# EAGLE board car_key (EAGLE 9.5.1)
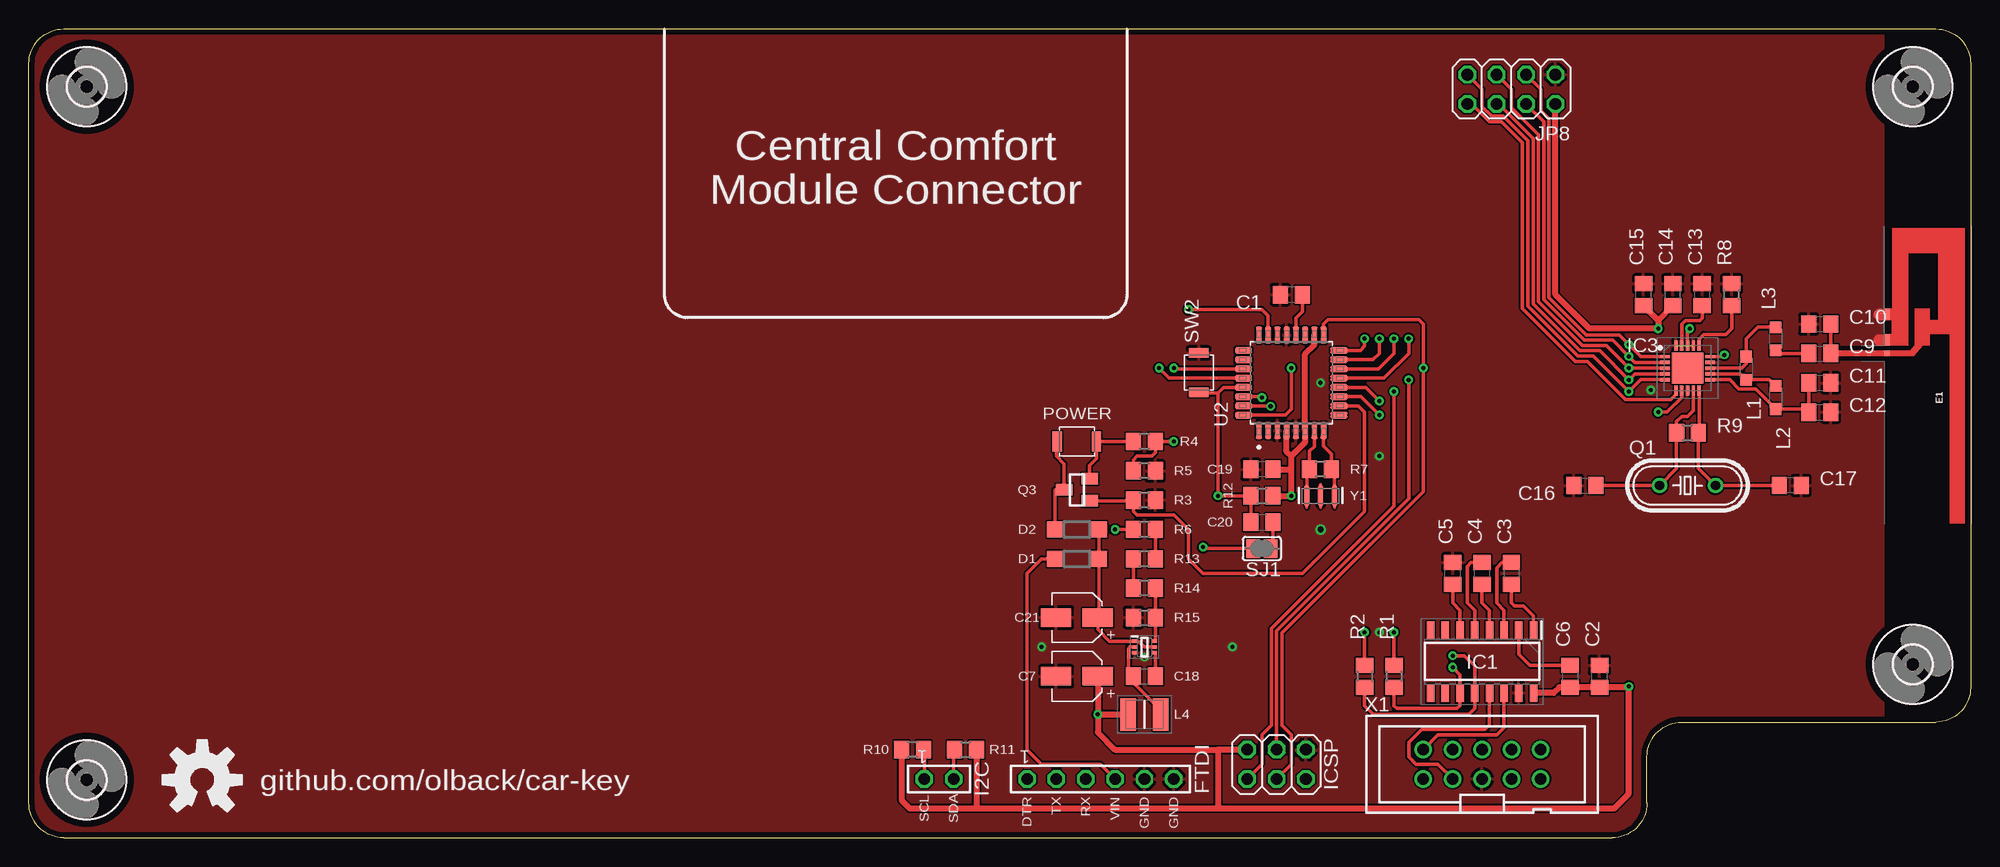
[diagram p0: board, top side]
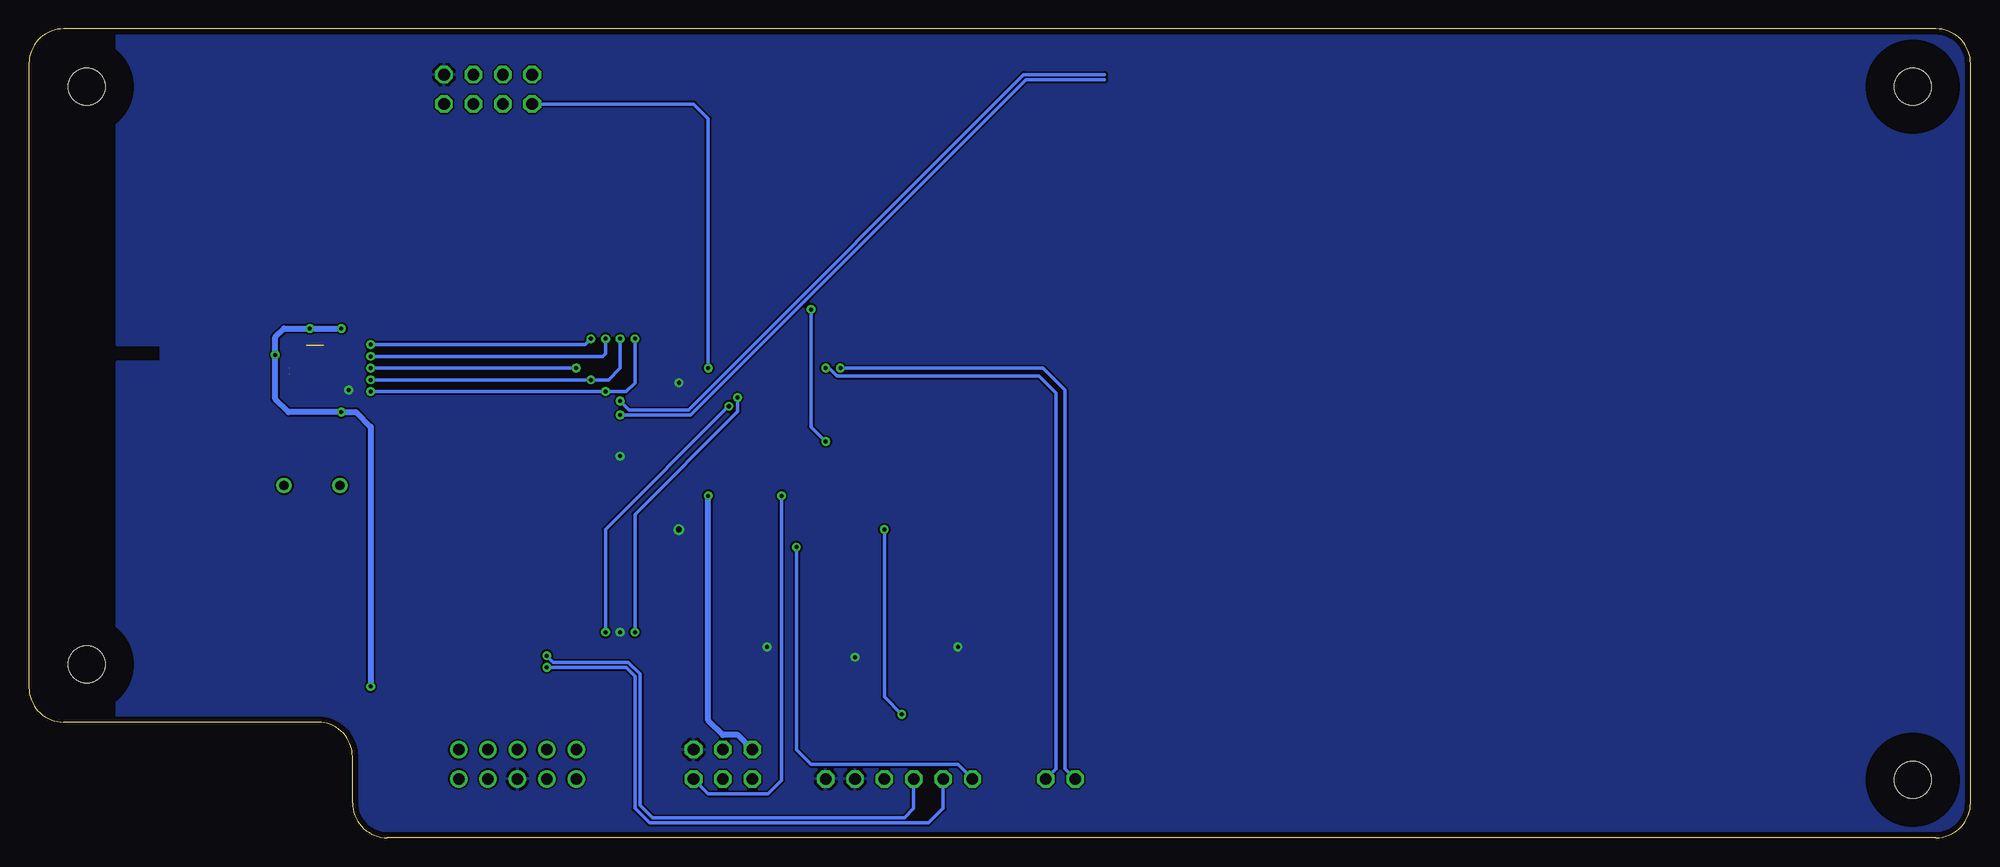
[diagram p1: board, bottom side, seen from below]

Size 168 x 70 mm. Coordinates in mm from the lower left corner, seen from the top.
Outline: 165,70 arc-90 168,67 168,13 arc-90 165,10 143,10 arc90 140,7 140,3 arc-90 137,0 3,0 arc-90 0,3 0,67 arc-90 3,70 165,70
Copper layers (1*16): Top 0.035mm / dielectric 1.5mm / Bottom 0.035mm
Design rules "default *": minimum track width 10mil, minimum drill 0.35mm, track to track 6mil, track to pad 6mil, pad to pad 6mil, via to via 6mil, smd to smd 6mil, copper to edge 20mil, drill to drill 8mil, minimum pad ring 10mil, minimum via ring 8mil, stop-mask expansion 4mil, vias tented up to drill 0mil, thermal gap 10mil

## Footprints (pad centres in the part's own frame; a part is rotated, then mirrored left to right if it is on the bottom)
C0805 = smd 1.3 x 1.5: 1 -0.95,0; 2 0.95,0
2.6X1.6X1(BXCXA) = smd 2.6 x 1.6: 1 1.8,0; 2 -1.8,0
SOD123 = smd 1.4 x 1.4: A 1.9,0; C -1.9,0
TRACE_ANTENNA_2.4GHZ_25.7MM = smd 0.46 x 0.46: ANT 0,0.23 | smd 1 x 0.46: GND -1.18,0.23; GND2 -3.38,0.23
TSW-106-XX-G-S = drill 1 pad 1.5 octagon: 1 6.35,0; 2 3.81,0; 3 1.27,0; 4 -1.27,0; 5 -3.81,0; 6 -6.35,0
TSW-102-XX-G-S = drill 1 pad 1.5 octagon: 1 1.27,0; 2 -1.27,0
SOIC127P600X175-16N = smd 1.525 x 0.65: 1 -2.712,4.445; 2 -2.712,3.175; 3 -2.712,1.905; 4 -2.712,0.635; 5 -2.712,-0.635; 6 -2.712,-1.905; 7 -2.712,-3.175; 8 -2.712,-4.445; 9 2.712,-4.445; 10 2.712,-3.175; 11 2.712,-1.905; 12 2.712,-0.635; 13 2.712,0.635; 14 2.712,1.905; 15 2.712,3.175; 16 2.712,4.445
QFN50P400X400X95-21N = smd 0.85 x 0.3: 1 -1.95,1; 2 -1.95,0.5; 3 -1.95,0; 4 -1.95,-0.5; 5 -1.95,-1; 11 1.95,-1; 12 1.95,-0.5; 13 1.95,0; 14 1.95,0.5; 15 1.95,1 | smd 0.3 x 0.85: 6 -1,-1.95; 7 -0.5,-1.95; 8 0,-1.95; 9 0.5,-1.95; 10 1,-1.95; 16 1,1.95; 17 0.5,1.95; 18 0,1.95; 19 -0.5,1.95; 20 -1,1.95 | smd 2.7 x 2.7: 21 0,0
SOTFL50P160X60-6N = smd 0.475 x 0.3: 1 -0.838,0.5; 2 -0.838,0; 3 -0.838,-0.5; 4 0.838,-0.5; 5 0.838,0; 6 0.838,0.5
2X03 = drill 1.016 octagon: 1 -2.54,-1.27; 2 -2.54,1.27; 3 0,-1.27; 4 0,1.27; 5 2.54,-1.27; 6 2.54,1.27
2X04 = drill 1.016 octagon: 1 -3.81,-1.27; 2 -3.81,1.27; 3 -1.27,-1.27; 4 -1.27,1.27; 5 1.27,-1.27; 6 1.27,1.27; 7 3.81,-1.27; 8 3.81,1.27
L2012C = smd 1 x 1: 1 -1,0; 2 1,0
INDC3225X200N = smd 1.35 x 2.8: 1 -1.4,0; 2 1.4,0
B3U-1000P = smd 0.8 x 1.7: 1 -1.7,0; 2 1.7,0
HC49/S = drill 0.813: 1 -2.413,0; 2 2.413,0
SUPER-SOT3 = smd 1 x 1.4: 1 -0.95,-1.1; 2 0.95,-1.1; 3 0,1.1
R0805 = smd 1.3 x 1.5: 1 -0.95,0; 2 0.95,0
SJ = smd 1.168 x 1.6: 1 -0.762,0; 2 0.762,0
TQFP-32 = smd 1.5 x 0.57: 1 -4.13,2.8; 2 -4.13,2; 3 -4.13,1.2; 4 -4.13,0.4; 5 -4.13,-0.4; 6 -4.13,-1.2; 7 -4.13,-2; 8 -4.13,-2.8; 17 4.13,-2.8; 18 4.13,-2; 19 4.13,-1.2; 20 4.13,-0.4; 21 4.13,0.4; 22 4.13,1.2; 23 4.13,2; 24 4.13,2.8 | smd 0.57 x 1.5: 9 -2.8,-4.13; 10 -2,-4.13; 11 -1.2,-4.13; 12 -0.4,-4.13; 13 0.4,-4.13; 14 1.2,-4.13; 15 2,-4.13; 16 2.8,-4.13; 25 2.8,4.13; 26 2,4.13; 27 1.2,4.13; 28 0.4,4.13; 29 -0.4,4.13; 30 -1.2,4.13; 31 -2,4.13; 32 -2.8,4.13
3,2 = hole 3.2: 0,0
PAK100/2500-10 = drill 1 pad 1.422: 1 -5.08,-1.27; 2 -5.08,1.27; 3 -2.54,-1.27; 4 -2.54,1.27; 5 0,-1.27; 6 0,1.27; 7 2.54,-1.27; 8 2.54,1.27; 9 5.08,-1.27; 10 5.08,1.27
RESONATOR-SMD-3.2X1.3 = smd 0.45 x 1.905: 1 -1.2,0; 2 0,0; 3 1.2,0

## Placement (x,y rotation side)
C1  0.1uF  [C0805]  109.22,46.99 180 top
C2  0.1uF  [C0805]  135.89,13.97 90 top
C3  0.1uF  [C0805]  128.27,22.86 270 top
C4  0.1uF  [C0805]  125.73,22.86 90 top
C5  0.1uF  [C0805]  123.19,22.86 90 top
C6  0.1uF  [C0805]  133.35,13.97 270 top
C7  47u  [2.6X1.6X1(BXCXA)]  90.68,13.97 0 top
C9  1.5pF  [C0805]  154.94,41.91 0 top
C10  1pF  [C0805]  154.94,44.45 0 top
C11  2.2nF  [C0805]  154.94,39.37 0 top
C12  4.7pF  [C0805]  154.94,36.83 0 top
C13  33nF  [C0805]  144.78,46.99 90 top
C14  10nF  [C0805]  142.24,46.99 90 top
C15  1nF  [C0805]  139.7,46.99 90 top
C16  22pF  [C0805]  134.62,30.48 0 top
C17  22pF  [C0805]  152.4,30.48 180 top
C18  0.1u  [C0805]  96.52,13.97 0 top
C19  0.1uF  [C0805]  106.68,31.88 180 top
C20  0.1uF  [C0805]  106.68,27.3 0 top
C21  10u  [2.6X1.6X1(BXCXA)]  90.68,19.05 0 top
D1  [SOD123]  90.68,24.13 180 top
D2  [SOD123]  90.68,26.67 180 top
E1  ANTENNA-GROUNDEDTRACE-25.7MM  [TRACE_ANTENNA_2.4GHZ_25.7MM]  160.53,41.91 270 top
FTDI  TSW-106-08-G-S  [TSW-106-XX-G-S]  92.71,5.08 180 top
I2C  TSW-102-08-G-S  [TSW-102-XX-G-S]  78.74,5.08 180 top
IC1  MAX3232ECD  [SOIC127P600X175-16N]  125.73,15.24 270 top
IC3  NRF24L01P-R7  [QFN50P400X400X95-21N]  143.51,40.64 0 top
IC4  TPS562231DRLR  [SOTFL50P160X60-6N]  96.52,16.51 0 top
JP1  ICSP  [2X03]  107.95,6.35 0 top
JP8  nRF24L01+ Module  [2X04]  128.27,64.77 180 top
L1  8.2nH  [L2012C]  148.59,40.64 270 top
L2  2.7nH  [L2012C]  151.13,38.1 270 top
L3  3.9nH  [L2012C]  151.13,43.18 270 top
L4  DFE322520FD-3R3M=P2  [INDC3225X200N]  96.52,10.67 180 top
POWER  B3U-1000P  [B3U-1000P]  90.68,34.29 180 top
Q1  16M  [HC49/S]  143.51,30.48 0 top
Q3  FDN360P  [SUPER-SOT3]  90.68,30.1 90 top
R1  1K  [R0805]  118.11,13.97 270 top
R2  1K  [R0805]  115.57,13.97 270 top
R3  10K  [R0805]  96.52,29.21 180 top
R4  10K  [R0805]  96.52,34.29 180 top
R5  2K  [R0805]  96.52,31.75 180 top
R6  43k  [R0805]  96.52,26.67 180 top
R7  1M  [R0805]  111.76,31.88 180 top
R8  22K  [R0805]  147.32,46.99 90 top
R9  10K  [R0805]  143.51,35.05 0 top
R10  10k  [R0805]  76.45,7.62 180 top
R11  10k  [R0805]  81.03,7.62 0 top
R12  10K  [R0805]  106.68,29.59 0 top
R13  2.2k  [R0805]  96.52,24.13 180 top
R14  100  [R0805]  96.52,21.59 180 top
R15  10k  [R0805]  96.52,19.05 0 top
SJ1  [SJ]  106.68,25.02 180 top
SW2  B3U-1000P  [B3U-1000P]  101.22,40.26 270 top
U2  ATMEGA328P-AU  [TQFP-32]  109.22,39.37 90 top
U$1  [3,2]  5,5 0 top
U$2  [3,2]  5,65 0 top
U$3  [3,2]  163,65 0 top
U$4  [3,2]  163,15 0 top
U$5  [OSHW-LOGO-L]  15,5 0 top
X1  RS232  [PAK100/2500-10]  125.73,6.35 0 top
Y1  8MHz  [RESONATOR-SMD-3.2X1.3]  111.76,29.59 0 top

## Library data of the parts
C1-C6 C18-C20 = rcl; SPICEPREFIX: C
C7 = Wurth_Elektronik_Passive_Capacitors_rev18b; WE-NUMBER: 865080140004/47uF
C9-C17 = resistor
C21 = Wurth_Elektronik_Passive_Capacitors_rev18b; WE-NUMBER: 865080340001/10uF
D1 D2 = diode
E1 = SparkFun-RF
FTDI = con-samtec; MF: Samtec Inc.; MPN: TSW-106-07-G-S
I2C = con-samtec; MF: Samtec Inc.; MPN: TSW-102-07-G-S
IC1 = MAX3232ECD; DESCRIPTION: Texas Instruments MAX3232ECD, Dual Line Transceiver, EIA/TIA-232-F/ RS-232/ V.28 2-TX 2-RX 2-TRX, 3.3 V, 5 V, 16-Pin; HEIGHT: 1.75mm; MANUFACTURER_NAME: Texas Instruments; MANUFACTURER_PART_NUMBER: MAX3232ECD; MOUSER_PART_NUMBER: 595-MAX3232ECD; MOUSER_PRICE-STOCK: https://www.mouser.com/Search/Refine.aspx?Keyword=595-MAX3232ECD; RS_PART_NUMBER: 6608704P; RS_PRICE-STOCK: http://uk.rs-online.com/web/p/products/6608704P
IC3 = NRF24L01P-R7; DESCRIPTION: NORDIC SEMICONDUCTOR - NRF24L01P-R7 - RF TRANSCEIVER, 2MBPS, 2.525GHZ, QFN-20; HEIGHT: 0.95mm; MANUFACTURER_NAME: Nordic Semiconductor; MANUFACTURER_PART_NUMBER: NRF24L01P-R7; MOUSER_PART_NUMBER: 949-NRF24L01P-R7; MOUSER_PRICE-STOCK: https://www.mouser.com/Search/Refine.aspx?Keyword=949-NRF24L01P-R7
IC4 = TPS562231DRLR; DESCRIPTION: 4.5-V to 17-V input, 2-A output, synchronous step-down converter; HEIGHT: 0.6mm; MANUFACTURER_NAME: Texas Instruments; MANUFACTURER_PART_NUMBER: TPS562231DRLR; MOUSER_PART_NUMBER: 595-TPS562231DRLR; MOUSER_PRICE-STOCK: https://www.mouser.com/Search/Refine.aspx?Keyword=595-TPS562231DRLR
JP1 JP8 = pinhead
L1-L3 = rcl; SPICEPREFIX: L
L4 = DFE322520FD-3R3M=P2; DESCRIPTION: DFE322520F_D Series Inductor 3.3uH +/-20% 1210 (3225); HEIGHT: 2mm; MANUFACTURER_NAME: Murata Electronics; MANUFACTURER_PART_NUMBER: DFE322520FD-3R3M=P2; MOUSER_PART_NUMBER: 81-DFE322520FD3R3MP2; MOUSER_PRICE-STOCK: https://www.mouser.com/Search/Refine.aspx?Keyword=81-DFE322520FD3R3MP2
POWER SW2 = Switch; CREATED_BY: PCBLayout.com; DIGI_KEY_PART_NUMBER: SW1020CT-ND; MANUFACTURER: Omron Electronics Inc-EMC Div; MPN: B3U-1000P; PACKAGE: SPST-NO
Q1 = crystal; OC_FARNELL: 1667008; OC_NEWARK: unknown
Q3 = transistor-power
R1-R15 = rcl; SPICEPREFIX: R
SJ1 = jumper
U2 = Microcontroller; CREATED_BY: PCBLayout.com; DIGIKEY_PART_NUMBER: ATMEGA328P-AU-ND; MANUFACTURER: Microchip Technology; MPN: ATMEGA328P-AU; PACKAGE: TQFP-32
U$1-U$4 = holes
U$5 = SparkFun-Aesthetics
X1 = con-3m; MF: 3M; MPN: 2510-6002UB; OC_FARNELL: 9838244; OC_NEWARK: 46F4725
Y1 = SparkFun-Clocks; PROD_ID: XTAL-08895

## Nets
BAT: POWER.1 Q3.2 R4.2
CE: IC3.1 JP8.3 U2.13
CSN: IC3.2 JP8.4 U2.14
DTR: FTDI.1 SJ1.2
FTDI_VCC: D1.A FTDI.4
GND: C1.2 C2.2 C5.2 C7.2 C10.1 C11.2 C12.2 C13.2 C14.2 C15.2 C16.1 C17.1 C19.2 C21.2 E1.GND E1.GND2 FTDI.5 FTDI.6 IC1.15 IC3.8 IC3.14 IC3.17 IC3.20 IC4.3 JP1.6 JP8.1 R3.1 R5.1 R8.2 R15.1 SW2.1 U2.3 U2.5 U2.21 X1.5 Y1.2
INT: IC3.6 JP8.8 U2.32
MISO: IC3.5 JP1.1 JP8.7 U2.16
MOSI: IC3.4 JP1.4 JP8.6 U2.15
N$1: C1.1 U2.20
N$2: R7.2 U2.7 Y1.1
N$3: R7.1 U2.8 Y1.3
N$4: R1.1 U2.31
N$5: R2.1 U2.30
N$6: C5.1 IC1.6
N$7: C3.2 IC1.1
N$8: C4.2 IC1.5
N$9: C3.1 IC1.3
N$10: C4.1 IC1.4
N$11: C6.1 IC1.2
N$12: IC1.13 X1.3
N$13: IC1.14 X1.2
N$14: IC3.13 L1.1 L3.1
N$15: IC3.12 L1.2 L2.1
N$16: C11.1 C12.1 IC3.11 L2.2
N$17: C9.1 L3.2
N$18: C9.2 C10.2 E1.ANT
N$19: C13.1 IC3.19
N$21: C16.2 IC3.9 Q1.1 R9.1
N$22: C17.2 IC3.10 Q1.2 R9.2
N$23: IC3.16 R8.1
N$24: C18.1 IC4.2 L4.1
N$25: C18.2 IC4.4
N$26: R13.2 R14.2
N$27: C21.1 D1.C D2.C IC4.1 IC4.5
N$28: C20.2 SJ1.1
N$30: R6.1 R13.1
N$31: IC4.6 R14.1 R15.2
N$33: D2.A POWER.2 Q3.3
RESET: C20.1 JP1.5 R12.1 SW2.2 U2.29
RX-I: FTDI.3 IC1.12 R2.2
S_LOCK: U2.12
S_POWER: Q3.1 R3.2 U2.10
S_UNLOCK: U2.11
SCK: IC3.3 JP1.3 JP8.5 U2.17
SCL: I2C.1 R10.1 U2.28
SDA: I2C.2 R11.1 U2.27
TX-O: FTDI.2 IC1.11 R1.2
V_SENSE: R4.1 R5.2 U2.23
VCC: C2.1 C6.2 C7.1 C14.1 C15.1 C19.1 IC1.16 IC3.7 IC3.15 IC3.18 JP1.2 JP8.2 L4.2 R6.2 R10.2 R11.2 R12.2 U2.4 U2.6 U2.18

## Tracks (layer width: path | path; a pad name or v marks a point on that pad's centre or on a via)
BAT
  Top 0.305: Q3.2 91.78,32.22 92.38,32.81 POWER.1 R4.2
CE  (via drill 0.35)
  Top 0.305: IC3.1 139.46,41.64 v138.43,42.67 137.59,43.51 134.77,43.51 131.52,46.76 131.52,62.23 130.81,62.94 130.81,64.77 JP8.3 | U2.13 117.24,39.77 119.38,41.91 v119.38,43.18
  Bottom 0.305: v119.38,43.18 119.89,42.67 v138.43,42.67
CSN  (via drill 0.35)
  Top 0.305: IC3.2 138.95,41.14 v138.43,41.66 137.03,43.05 134.58,43.05 131.06,46.57 131.06,61.98 JP8.4 | v118.11,43.18 118.11,41.91 116.77,40.57 U2.14
  Bottom 0.305: v118.11,43.18 118.11,41.91 118.36,41.66 v138.43,41.66
DTR  (via drill 0.35)
  Top 0.305: SJ1.2 101.73,25.02 v101.6,25.15
  Bottom 0.305: FTDI.1 87.63,6.35 100.33,6.35 101.6,7.62 v101.6,25.15
FTDI_VCC
  Top 0.305: FTDI.4 92.71,6.35 87.63,6.35 86.36,7.62 86.36,22.86 87.63,24.13 D1.A
GND  (via drill 0.35, 0.5)  (1 unrouted)
  Top 1.016: E1.GND 160.11,43.09 | E1.GND2 160.1,45.29
  other vias: 140.34,38.73 116.84,17.78 116.84,33.02 111.76,26.67 96.52,15.62 87.63,16.51 111.76,39.37 104.14,16.51
  pour Top: 160.4,-1.27 -1.27,-1.27 -1.27,71.12 160.15,71.12 160.4,70.87 160.4,42.67 156.59,42.67 156.59,41.15 160.4,41.15
  pour Bottom: -1.27,-1.27 -1.27,71.12 160.4,71.12 160.4,42.67 156.59,42.67 156.59,41.15 160.4,41.15 160.4,-1.27
INT  (via drill 0.35)
  Top 0.305: JP8.8 124.84,63.5 126.37,61.98 127.4,61.98 129.24,60.14 129.24,45.81 133.82,41.22 134.85,41.22 138.15,37.92 142.06,37.92 142.51,38.37 IC3.6 | U2.32 108.71,36.57 109.22,37.08 v109.22,40.64
  Bottom 0.305: JP8.8 110.49,63.5 109.22,62.23 v109.22,40.64
MISO  (via drill 0.35)
  Top 0.305: IC3.5 139.46,39.64 v138.43,38.61 135.36,41.68 134.01,41.68 129.69,46 129.69,60.33 127.59,62.43 126.56,62.43 125.73,63.26 125.73,64.77 JP8.7 | U2.16 115.19,42.17 115.57,42.55 v115.57,43.18 | JP1.1 106.68,6.35 106.68,8.89 107.49,9.7 107.49,18.1 118.11,28.71 v118.11,38.61
  Bottom 0.305: v115.57,43.18 115.57,39.37 116.33,38.61 v118.11,38.61 v138.43,38.61
MOSI  (via drill 0.35)
  Top 0.305: IC3.4 138.95,40.14 v138.43,39.62 135.91,42.14 134.2,42.14 130.15,46.19 130.15,60.52 127.17,63.5 JP8.6 | U2.15 116.3,41.37 116.84,41.91 v116.84,43.18 | JP1.4 107.95,17.91 119.38,29.34 v119.38,39.62
  Bottom 0.305: v116.84,43.18 116.84,40.64 117.86,39.62 v119.38,39.62 v138.43,39.62
N$1
  Top 0.305: C1.1 110.17,45.53 109.62,44.98 U2.20
N$2
  Top 0.305: Y1.1 110.56,31.63 R7.2 110.81,33.47 111.22,33.88 U2.7
N$3
  Top 0.305: Y1.3 112.96,31.63 R7.1 112.71,33.21 112.02,33.9 U2.8
N$4  (via drill 0.35)
  Top 0.305: U2.31 107.41,37.37 v107.44,37.34 | v118.11,17.78 R1.1
  Bottom 0.305: v107.44,37.34 118.11,26.67 v118.11,17.78
N$5  (via drill 0.35)
  Top 0.305: U2.30 106.61,38.17 v106.68,38.1 | v115.57,17.78 R2.1
  Bottom 0.305: v106.68,38.1 106.68,36.88 115.57,27.99 v115.57,17.78
N$6
  Top 0.305: IC1.6 123.83,19.68 123.19,20.32 C5.1
N$7
  Top 0.305: IC1.1 130.18,19.18 129.29,20.07 128.52,20.07 128.27,20.32 C3.2
N$8
  Top 0.305: IC1.5 125.09,19.68 124.46,20.32 124.46,23.5 124.78,23.81 C4.2
N$9
  Top 0.305: IC1.3 127.64,19.68 127,20.32 127,23.37 127.44,23.81 C3.1
N$10
  Top 0.305: IC1.4 126.36,19.68 125.73,20.32 C4.1
N$11
  Top 0.305: IC1.2 128.91,15.88 129.86,14.92 C6.1
N$12
  Top 0.305: X1.3 121.92,6.35 120.02,6.35 119.38,6.99 119.38,8.26 120.52,9.4 125.98,9.4 126.36,9.78 IC1.13
N$13
  Top 0.305: X1.2 121.92,8.89 127,8.89 127.64,9.53 IC1.14
N$14  (1 unrouted)
  Top 0.305: IC3.13 148.21,40.64 148.59,41.02 L1.1 148.59,43.18 149.59,44.18 L3.1
N$15  (1 unrouted)
  Top 0.305: IC3.12 148.09,40.14 L1.2 150.59,39.64 L2.1
N$16
  Top 0.305: IC3.11 147.16,39.64 147.96,38.84 149.4,38.84 L2.2 153.72,37.1 C12.1 C11.1
N$17
  Top 0.305: L3.2 151.4,41.91 C9.1
N$18
  Top 0.305: C9.2 C10.2
  Top 0.508: E1.ANT C9.2
N$19
  Top 0.305: IC3.19 143.01,44.46 143.3,44.75 144.57,44.75 144.78,44.96 C13.1
N$21
  Top 0.305: C16.2 Q1.1 142.56,31.94 R9.1 142.56,36.01 143,36.45 143.51,36.45 144.01,36.95 IC3.9
N$22
  Top 0.305: C17.2 Q1.2 144.46,31.94 R9.2 144.51,35.1 IC3.10
N$23
  Top 0.305: IC3.16 144.51,43.16 144.91,43.56 146.81,43.56 147.32,44.07 R8.1
N$24
  Top 0.305: IC4.2 95.25,16.51 95.12,16.38 95.12,14.42 C18.1 95.57,13.4 97.92,11.05 L4.1
N$25
  Top 0.305: IC4.4 97.47,15.9 C18.2
N$26
  Top 0.305: R13.2 R14.2
N$27
  Top 0.305: IC4.5 96.52,16.51 96.02,17.01 IC4.1 93.48,17.01 92.48,18.01 C21.1 92.58,19.15 D1.C D2.C
N$28
  Top 0.305: SJ1.1 107.63,25.21 C20.2
N$30
  Top 0.305: R6.1 R13.1
N$31
  Top 0.305: R14.1 R15.2 97.47,17.01 IC4.6
N$33
  Top 0.305: D2.A 88.78,30.1 Q3.3 89.58,32.34 88.9,33.02 88.9,34.21 POWER.2
RESET  (via drill 0.35)
  Top 0.305: 102.87,38.48 103.36,38.97 U2.29 | 102.87,38.48 v102.87,29.59 R12.1 C20.1 | SW2.2 101.3,38.48 102.87,38.48
  Bottom 0.305: JP1.5 109.22,3.81 104.03,3.81 102.87,4.97 v102.87,29.59
RX-I  (via drill 0.35)
  Top 0.305: R2.2 115.57,11.43 116.33,10.67 124.59,10.67 125.09,11.18 IC1.12 125.09,14.86 124.21,15.75 v123.19,15.75
  Bottom 0.305: v123.19,15.75 122.63,15.19 116.14,15.19 115.11,14.16 115.11,2.79 114.05,1.73 92.25,1.73 91.44,2.54 FTDI.3
S_LOCK  (via drill 0.35)
  Top 0.305: U2.12 115.67,38.97 v116.84,37.8
  Bottom 0.305: v116.84,37.8 116.08,37.03 110.93,37.03 81.93,66.04 74.93,66.04
S_POWER
  Top 0.305: U2.10 115.03,37.37 115.57,36.83 115.57,28.24 110.19,22.86 101.6,22.86 100.33,24.13 100.33,26.67 99.06,27.94 95.89,27.94 95.57,28.25 R3.2 95.51,29.15 Q3.1
S_UNLOCK  (via drill 0.35)
  Top 0.305: U2.11 115.25,38.17 v116.84,36.58
  Bottom 0.305: v116.84,36.58 110.74,36.58 81.74,65.58 74.93,65.58
SCK  (via drill 0.35)
  Top 0.305: IC3.3 v138.43,40.64 136.47,42.6 134.39,42.6 130.61,46.38 130.61,60.83 128.27,63.17 128.27,64.77 JP8.5 | U2.17 112.02,44.46 112.39,44.83 120.27,44.83 120.65,44.45 v120.65,40.64 120.65,29.96 108.41,17.72 108.41,9.7 109.22,8.89 109.22,6.35 JP1.3
  Bottom 0.305: v120.65,40.64 v138.43,40.64
SCL  (via drill 0.35)
  Top 0.305: R10.1 77.47,7.55 I2C.1 | U2.28 98.66,39.77 v97.79,40.64
  Bottom 0.305: v97.79,40.64 80.26,40.64 78.36,38.73 78.36,5.97 I2C.1
SDA  (via drill 0.35)
  Top 0.305: R11.1 80.01,7.55 I2C.2 | U2.27 99.13,40.57 v99.06,40.64
  Bottom 0.305: v99.06,40.64 98.76,40.64 98.07,39.96 80.6,39.96 79.12,38.48 79.12,5.97 I2C.2
TX-O  (via drill 0.35)
  Top 0.305: R1.2 118.11,11.43 118.36,11.18 123.57,11.18 123.83,11.43 IC1.11 123.83,14.1 v123.19,14.73
  Bottom 0.305: v123.19,14.73 116.33,14.73 115.57,13.97 115.57,2.54 114.3,1.27 90.17,1.27 88.9,2.54 FTDI.2
V_SENSE  (via drill 0.35)
  Top 0.305: R5.2 95.57,32.7 95.89,33.02 97.16,33.02 97.47,33.34 R4.1 v99.06,34.29 | U2.23 107.22,45.18 106.68,45.72 v100.33,45.72
  Bottom 0.305: v99.06,34.29 100.33,35.56 v100.33,45.72
VCC  (via drill 0.35)
  Top 0.305: IC3.15 146.54,41.64 v146.69,41.78 | IC3.7 143.01,38.11 141.73,36.83 v140.97,36.83 | IC3.18 143.51,43.89 v143.69,44.07 | 110.49,35.17 U2.6 | R6.2 v93.98,26.67
  Top 0.508: C14.1 140.97,44.77 | 140.97,44.77 v140.97,44.07 135,44.07 132.08,46.99 JP8.2 | C15.1 140.97,44.77 | JP1.2 102.87,7.62 | 102.87,7.62 102.87,2.54 | 81.98,2.54 102.87,2.54 | R11.2 81.98,2.54 | C19.1 109.22,31.88 | 109.22,31.88 v109.22,29.59 R12.2 | 109.22,31.88 109.22,33.02 | 109.22,33.02 108.82,33.42 U2.4 | 109.22,33.02 110.42,34.22 U2.6 110.42,41.84 111.22,42.64 U2.18 | IC1.16 131.91,12.53 132.4,13.02 C6.2 C2.1 138.37,13.02 v138.43,13.08 138.43,3.81 137.16,2.54 102.87,2.54 | C7.1 v92.48,10.67 | v92.48,10.67 L4.2 | v92.48,10.67 92.48,9.12 93.98,7.62 102.87,7.62 | R10.2 75.5,3.24 76.2,2.54 81.98,2.54
  Bottom 0.305: v93.98,26.67 93.98,12.17 v92.48,10.67
  Bottom 0.508: 140.84,44.07 v140.97,44.07 v143.69,44.07 145.92,44.07 146.69,43.31 v146.69,41.78 146.69,37.97 145.54,36.83 v140.97,36.83 139.7,36.83 138.43,35.56 v138.43,13.08 | JP1.2 106.68,8.89 107.95,8.89 109.22,10.16 v109.22,29.59

## Text on the board
tPlace: github.com/olback/car-key
tNames: Central Comfort / Module Connector | DTR | TX | RX | VIN | GND | GND | SCL | SDA